# Altium PCB LAMP.PcbDoc
Units mm, origin at the board's own origin, x right, y up, seen from the top; angles counter-clockwise.
Board outline 52 x 60.73 mm, 2 copper layers (Top Layer, Bottom Layer); 27 components, 16 nets, 65 pads, 2 vias.
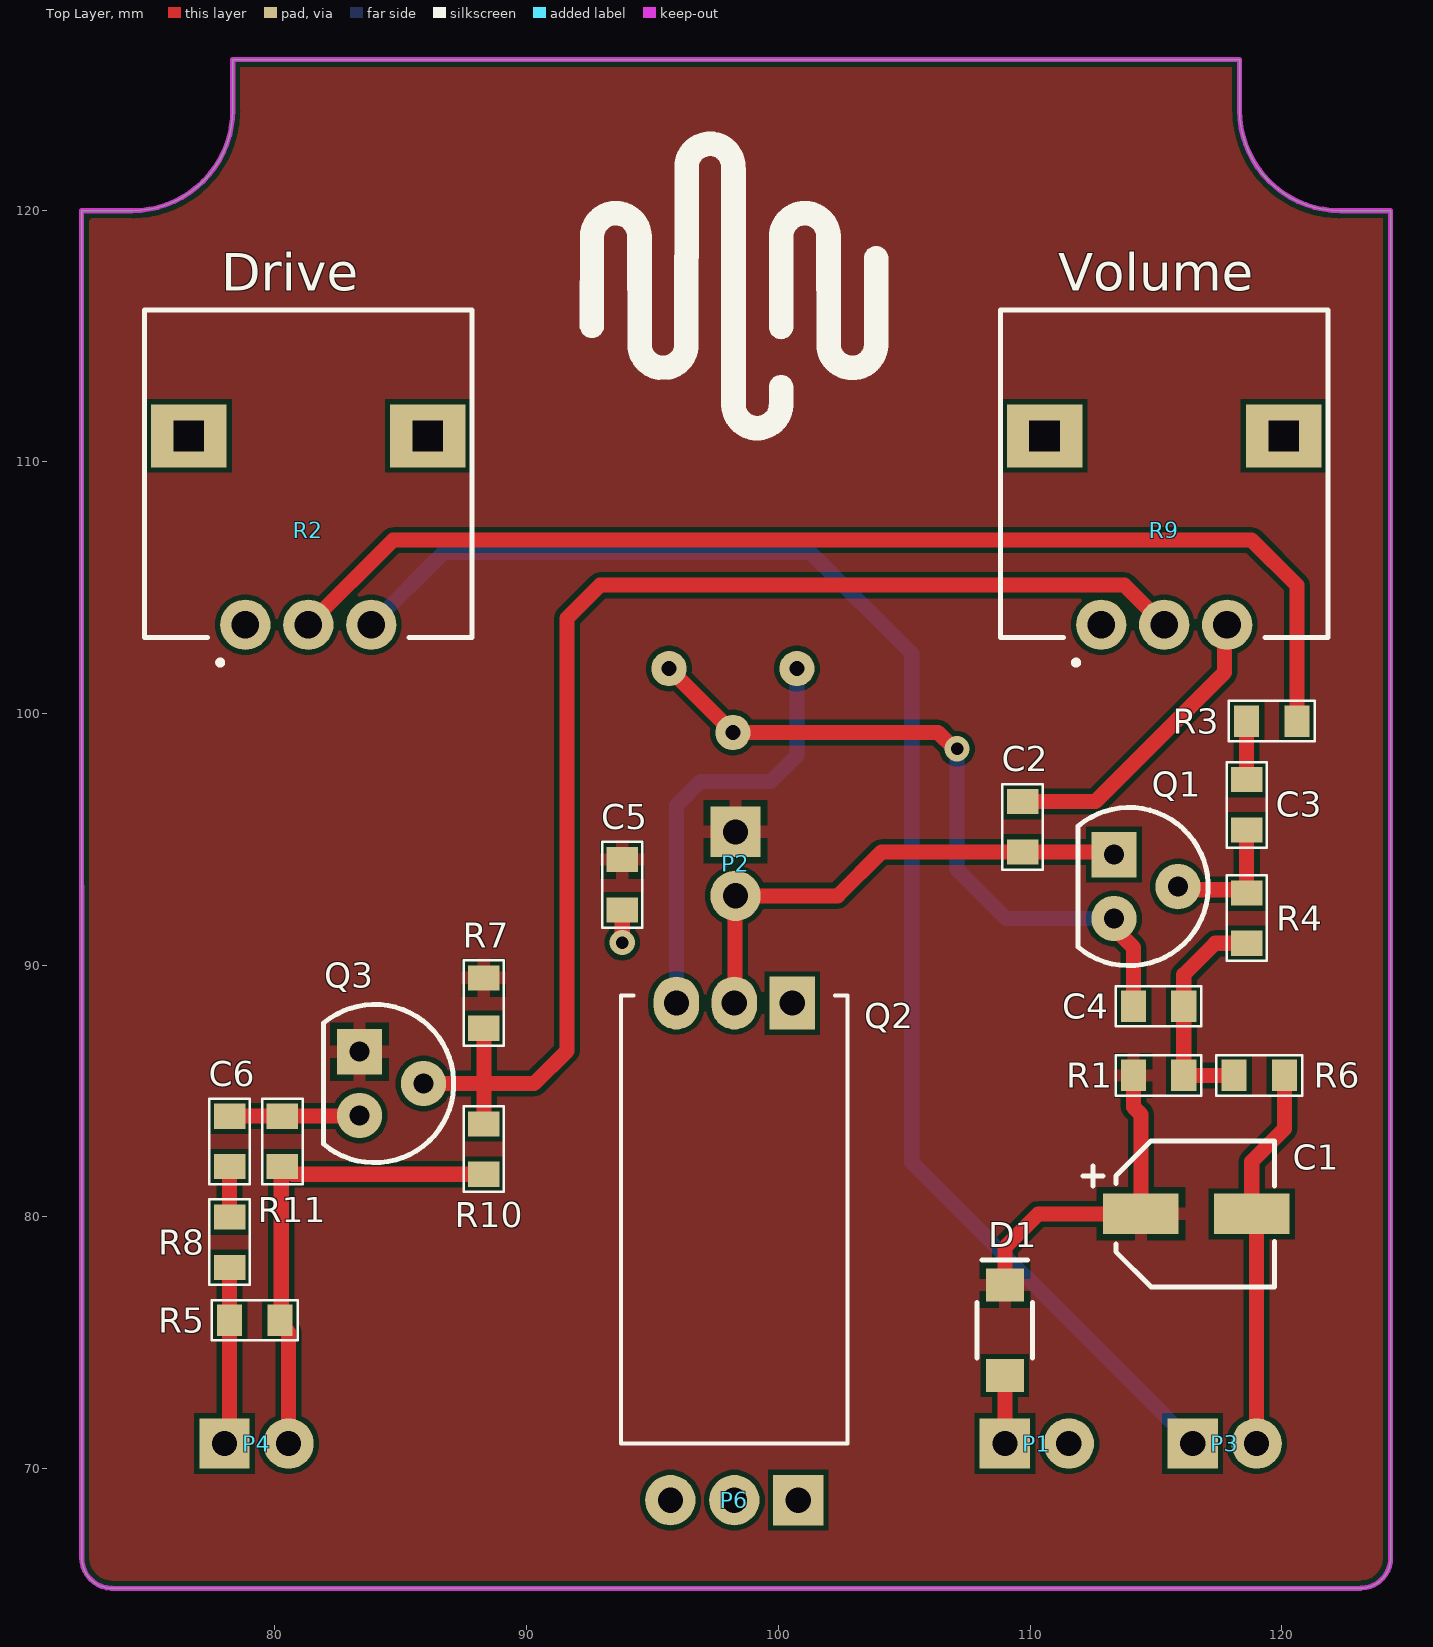
[diagram p0: Top Layer view]
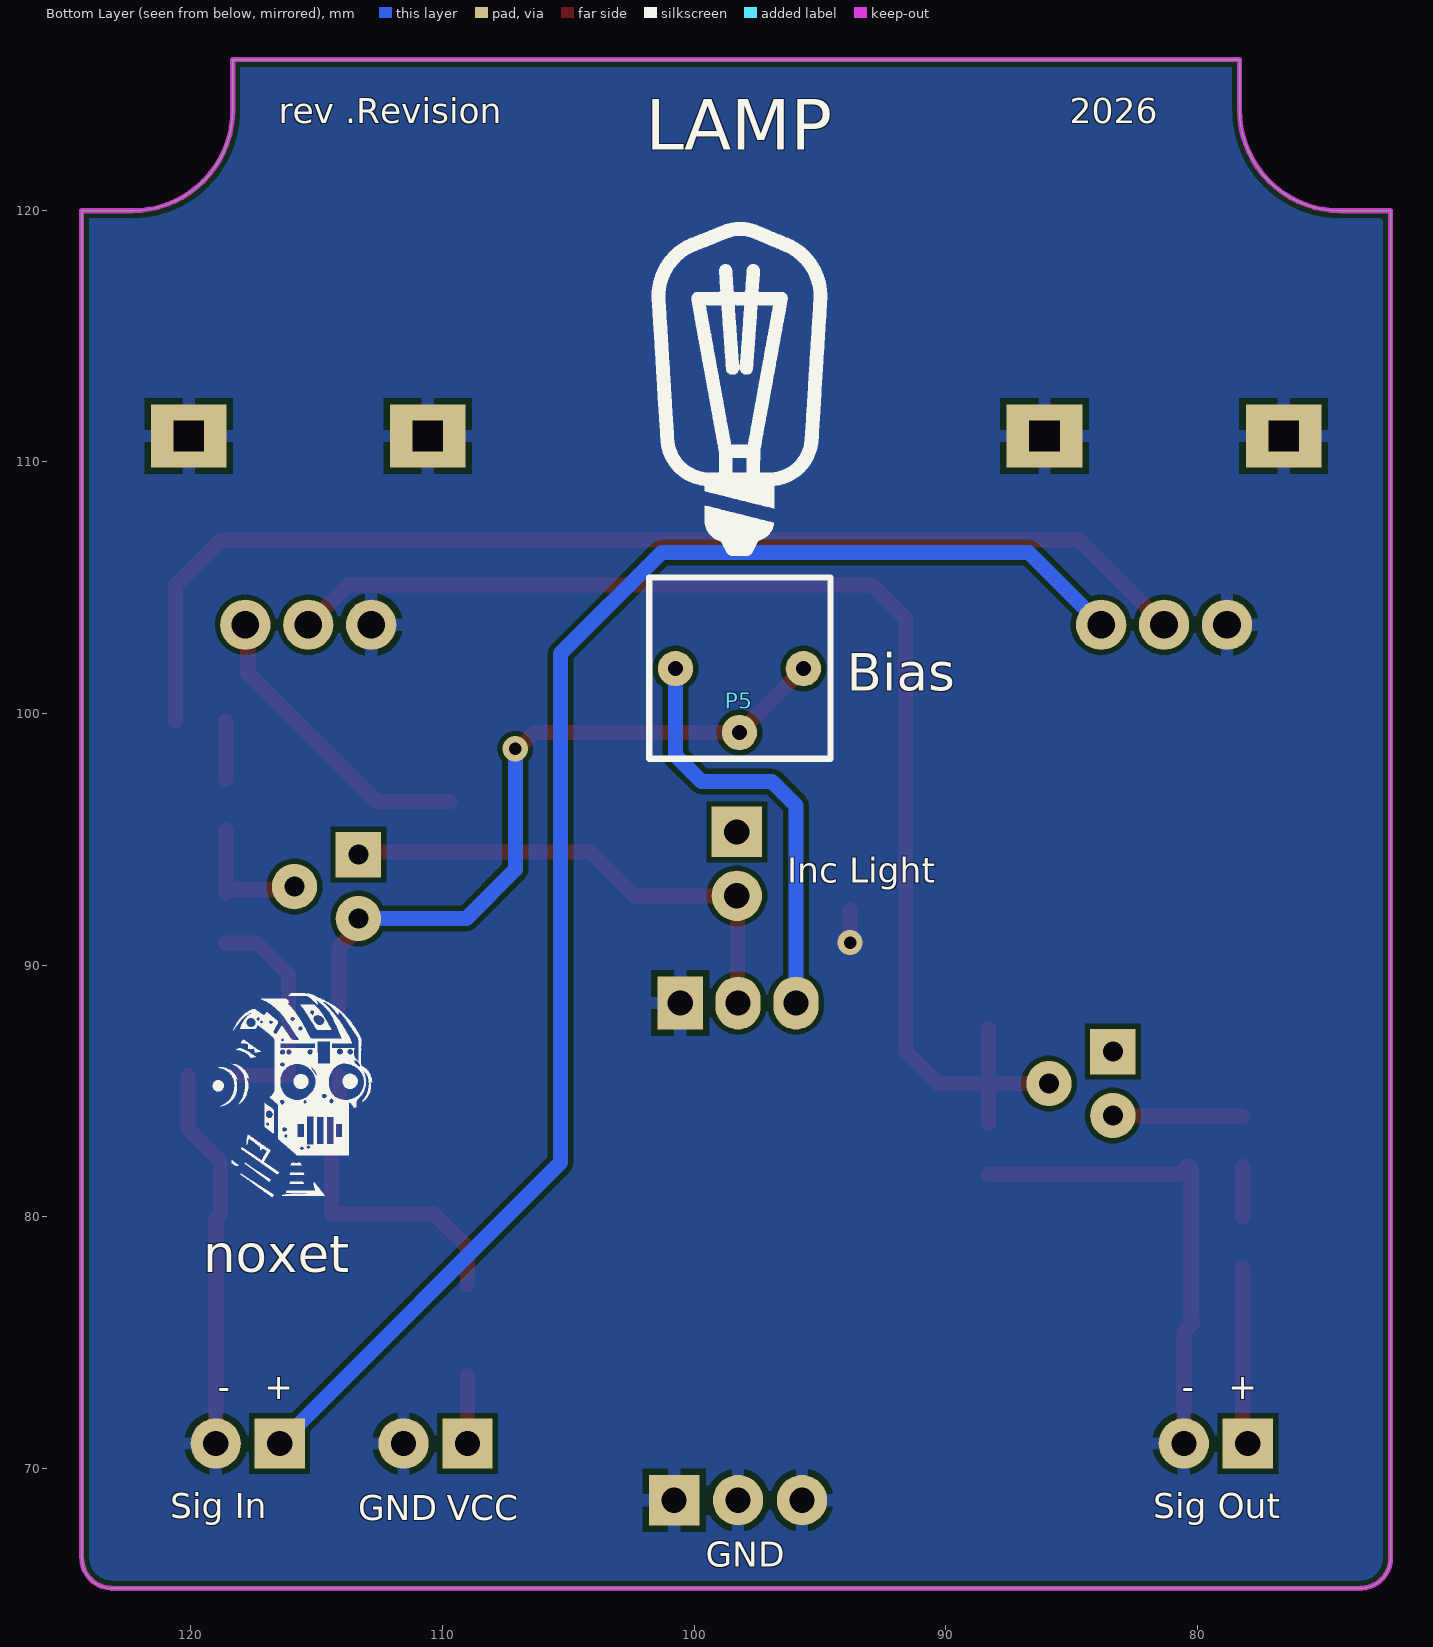
[diagram p1: Bottom Layer view, seen from below]
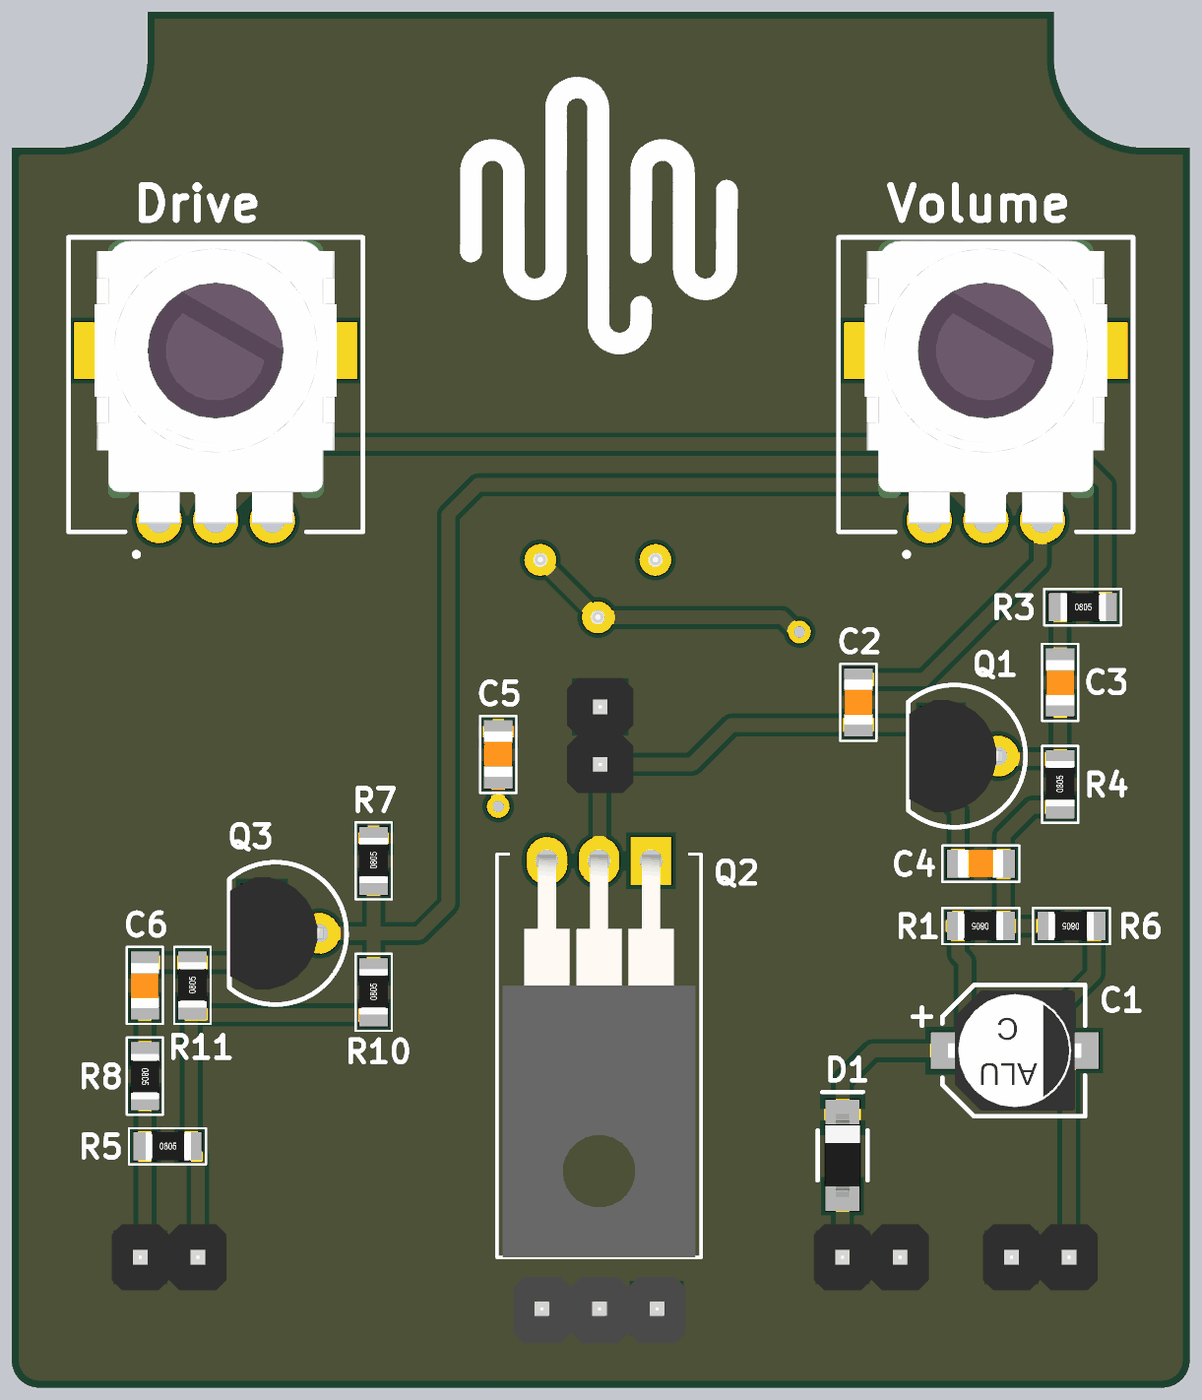
[diagram p2: 3D render of the assembled board from above, using the file's embedded part models]

## Layer stack, top to bottom
Top Solder: solder mask 0.0102, Solder Resist, Dk 3.5
Top Layer: signal copper 0.0356
Dielectric 1: dielectric 0.32, FR-4, Dk 4.8
Bottom Layer: signal copper 0.0356
Bottom Solder: solder mask 0.0102, Solder Resist, Dk 3.5

## Board outline
73.499,65.251 73.5,65.25 123.15,65.25 123.152,65.252 ccw(c123.114,66.463) 124.325,66.5 124.325,119.975 122.325,119.975 cw(c122.325,123.975) 118.325,123.975 118.325,125.975 78.325,125.975 78.325,123.975 cw(c74.325,123.975) 74.325,119.975 72.325,119.975 72.326,66.404 72.326,66.499 ccw(c73.537,66.462) 73.499,65.251

## Design rules (kind name [scope] priority, off if disabled: settings)
BoardOutlineClearance [All] p1: gap=0.3 ignorepadtopadclearanceinfootprint=FALSE except(0.4: Arc-SplitBarrior Arc-SplitContinuation Track-SplitBarrior Track-SplitContinuation SMDPad-SplitBarrior SMDPad-SplitContinuation THPad-SplitBarrior THPad-SplitContinuation Via-SplitBarrior Via-SplitContinuation Fill-SplitBarrior Fill-SplitContinuation Poly-SplitBarrior Poly-SplitContinuation Region-SplitBarrior Region-SplitContinuation Text-SplitBarrior Text-SplitContinuation)
Clearance [All] p1: gap=0.2 ignorepadtopadclearanceinfootprint=FALSE except(0.1: Arc-Arc Arc-Track Track-Track; 0.127: SMDPad-SMDPad SMDPad-Via THPad-Via Via-Via; 0.15: SMDPad-Text THPad-Text Via-Text; 0.254: Arc-Via Arc-Text Track-Via Track-Text SMDPad-THPad Fill-Text Poly-Text Region-Text Text-Text; 0.4: THPad-THPad)
HoleSize [All] p1: absolutevalues=TRUE maxlimit=6.3 minlimit=0.2 maxpercent=80.000 minpercent=20.000
HoleToHoleClearance [All] p1: gap=0.254 allowstackedmicrovias=FALSE
MinimumAnnularRing [All] p1: minimumring=0.13
MinimumSolderMaskSliver [All] p1: minsoldermaskwidth=0.13 // Black and white soldermask has 0.13, instead of 0.1mm
PolygonConnect PolygonConnect_1 [All] p1: thpad.connectstyle=Relief thpad.reliefconductorwidth=0.508 thpad.reliefentries=4 thpad.polygonreliefangle="90 Angle" thpad.airgapwidth=0.254 smdpad.connectstyle=Relief smdpad.reliefconductorwidth=0.508 smdpad.reliefentries=4 smdpad.polygonreliefangle="90 Angle" smdpad.airgapwidth=0.254 via.connectstyle=Direct via.reliefconductorwidth=0.508 via.reliefentries=4 via.polygonreliefangle="90 Angle" via.airgapwidth=0.254
RoutingCorners [All] p1: cornerstyle=Round minsetback=2.54 maxsetback=2.54
RoutingVias [All] p1: holewidth=0.5 width=1 viastyle="Through Hole" minholewidth=0.2 minwidth=0.35 maxholewidth=1 maxwidth=2
SilkToSilkClearance [All] p1: silktosilkclearance=0.1
SilkToSolderMaskClearance [IsPad] p1: minsilkscreentomaskgap=0.1 clearancetoexposedcopper=TRUE
SolderMaskExpansion [All] p1: expansion=0.05 istentingtop=FALSE
SupplyNets "Schematic Supply Nets_2" [InNet('VCC')] p1: voltage=0.000
SupplyNets "Schematic Supply Nets_1" [InNet('GND')] p2: voltage=0.000
Width PWR [InNetClass('PWR')] p1: maxlimit=0.8 minlimit=0.254 preferedwidth=0.6
Width [All] p2: maxlimit=2.54 minlimit=0.1 preferedwidth=0.6 minimp=50.000000 maximp=50.000000 favimp=50.000000
24 further rules are at their usual default settings.

## Components (designator, comment, footprint, x,y, rotation, side; value= is the part's Value field where it differs from the comment)
C1 "Capacitor, TH 2mm" "Cap, SMD, Polar, 5.3x5.3mm" 116.605,80.125 r90 top value=47u
C2 "0805, capacitor" "0805, cap" 109.7,96.5 r270 top value=1u
C3 "0805, capacitor" "0805, cap" 118.605,95.375 r90 top value=1u
C4 "0805, capacitor" "0805, cap" 114.105,88.375 r0 top value=1u
C5 "0805, capacitor" "0805, cap" 93.8,94.2 r270 top value=100n
C6 "0805, capacitor" "0805, cap" 78.2,82 r90 top value=100n
D1 "BAT48ZFILM" SOD123 109,75.5 r90 top
P1 "1x2 Pin Header" padtwo_L 109,71 r90 top
P2 "1x2 Pin Heade Straight" padtwo_L 98.3,95.3 r0 top locked value="1x2 Pin Header"
P3 "1x2 Pin Heade Straight" padtwo_L 116.46,71 r90 top value="1x2 Pin Header"
P4 "1x2 Pin Heade Straight" padtwo_L 78,71 r90 top value="1x2 Pin Header"
P5 "Pot" POT_3362P 98.2,101.8 r180 bottom value=2k
P6 "1x3 Pin Header" padThree_L 98.25,68.75 r180 top
Q1 "BC547B" BC547_TO-92_BENT 114.605,93.125 r0 top
Q2 "BD139" "TO-126 Angle" 100.55,88.5 r180 top
Q3 "BC547B" BC547_TO-92_BENT 84.63,85.3 r0 top
R1 "General resistor" 0805 116.105,85.625 r180 top value=100k
R2 "100k" RK09L_15mm 81.327,110.978 r0 top locked value=0
R3 "General resistor" 0805 118.6,99.7 r0 top value=1k
R4 "General resistor" 0805 118.605,90.875 r90 top value=10k
R5 "General resistor" 0805 78.2,75.9 r0 top value=470k
R6 "General resistor" 0805 120.105,85.625 r180 top value=22k
R7 "General resistor" 0805 88.3,87.5 r90 top value=100k
R8 "General resistor" 0805 78.2,80 r270 top value=100R
R9 "100k" RK09L_15mm 115.327,110.978 r0 top locked value=0
R10 "General resistor" 0805 88.3,81.7 r90 top value=120k
R11 "General resistor" 0805 80.3,82 r90 top value=10k

## Footprints (in the part's own frame and the unit in brackets; to place one, negate y for a bottom-side part, rotate by r counter-clockwise, add the part's x,y. Pads: shape width x height; smd on the part's side, far side on the other; paste and mask are expansions set on the pad)
0805 [mm]
  rect 1x1.25 smd: 0(2,0) 1(0,0)
  silkscreen extent -0.7,-0.8 2.7,0.8, body extent 0.03,-0.62 2.03,0.63, height 0.5
"0805, cap" [mm]
  rect 1x1.25 smd: 1(0,0) 2(2,0)
  silkscreen extent -0.7,-0.8 2.7,0.8, body extent -0.01,-0.62 1.99,0.63, height 0.8
BC547_TO-92_BENT [mm]
  rect 1.8x1.8 hole 0.8: 1(-1.27,1.27)
  round 1.8 hole 0.8: 2(1.27,0) 3(-1.27,-1.27)
  silkscreen extent -2.7,-3.14 2.47,3.14, body extent -2.67,-2.49 1.44,2.49, height 9.5
"Cap, SMD, Polar, 5.3x5.3mm" [mm] "Wurth WCAP-ASLI series"
  rect 1.6x3 smd: 1(0,-2.2) 2(0,2.2)
  silkscreen extent -2.9,-3.1 2.9,4.5, body extent -2.65,-2.95 2.65,2.95, height 5.41
padThree_L [mm] "Pad Diameter 2 mm, Hole  0.3 mm, Pitch 2.54 mm"
  rect 2x2 hole 1: 1(-2.54,0)
  round 2 hole 1: 2(0,0) 3(2.54,0)
  body extent -3.83,-1.38 3.79,1.54, height 8.53
padtwo_L [mm] "Pad Diameter 2 mm, Hole  0.3 mm, Pitch 2.54 mm"
  rect 2x2 hole 1: 1(0,0)
  round 2 hole 1: 2(0,-2.54)
  body extent -1.46,-3.81 1.46,1.27, height 8.51
POT_3362P [mm] "Trimpot  3362P"
  round 1.4 hole 0.6: 1(2.544,-0.014) 2(0.004,-2.554) 3(-2.536,-0.014)
  silkscreen extent -3.58,-3.6 3.62,3.6, body extent -3.3,-3.3 3.3,3.3, height 4.4
RK09L_15mm [mm] "Vertical Potentiometer, also known as RK097N"
  round 2 hole 1.1 mask+0.05: 1(-2.5,-7.45) 2(0,-7.45) 3(2.5,-7.45)
  rect 3x2.5 hole 1.2 square mask+0.05: MH(-4.75,0.05) MH(4.75,0.05)
  silkscreen extent -6.5,-9.05 6.5,5.05, body extent -6.05,-7.6 6.05,4.9, height 25.01
SOD123 [mm]
  rect 1.3x1.5 smd: 1(1.8,0) 2(-1.8,0)
  silkscreen extent -1.1,-1.1 2.8,1.1, body extent -1.85,-0.8 1.85,0.8, height 1.27
"TO-126 Angle" [mm] "Horizontal angled TO-126"
  rect 1.8x2.1 hole 1: 1(0,0)
  oval 1.8x2.1 hole 1: 2(2.3,0) 3(4.6,0)
  silkscreen extent -2.2,-0.3 6.8,17.5, body extent -1.95,-0.28 6.55,17.5, height 2.8

## Part data
C1: "Capacitor TH 2mm"
D1: "Rectifier Diode, Schottky, 1 Phase, 1 Element, 0.35A, 40V V(RRM), Silicon", Forward Voltage=250mV, Manufacturer=STMicroelectronics, Max Operating Temperature=150°C, Max Output current=350mA, Non-rep Pk Forward Current-Max=2A, Package Body Material=Plastic, Package Shape=Rectangular, Package Style="SMALL OUTLINEMeter", Peak Reflow Temperature (Cel)=260°C, Rep Pk Reverse Voltage-Max=40V, Supplier Part Number=7146853P, Time @ Peak Reflow Temperature-Max (s)=30s, Category="Rectifier Diodes", ComponentLink1Description=https://datasheet.ciiva.com:443/pdfs/VipMasterIC/IC/SGST/SGSTS30425/SGSTS30425-1.pdf?src-supplier=IHS+Markit, ComponentLink1URL=https://datasheet.ciiva.com:443/pdfs/VipMasterIC/IC/SGST/SGSTS30425/SGSTS30425-1.pdf?src-supplier=IHS+Markit, ComponentLink2Description=https://datasheet.ciiva.com/16421/cd00130229-16421639.pdf?src-supplier=Future+Electronics, ComponentLink2URL=https://datasheet.ciiva.com/16421/cd00130229-16421639.pdf?src-supplier=Future+Electronics, ComponentLink3Description=https://datasheet.ciiva.com/915/cd00130229-915584.pdf?src-supplier=Digikey, ComponentLink3URL=https://datasheet.ciiva.com/915/cd00130229-915584.pdf?src-supplier=Digikey, ComponentLink4Description=https://datasheet.ciiva.com/915/cd00130229-915585.pdf?src-supplier=Digikey, ComponentLink4URL=https://datasheet.ciiva.com/915/cd00130229-915585.pdf?src-supplier=Digikey, ComponentLink5Description=https://datasheet.ciiva.com/915/cd00130229-915586.pdf?src-supplier=Digikey, ComponentLink5URL=https://datasheet.ciiva.com/915/cd00130229-915586.pdf?src-supplier=Digikey, ComponentLink6Description=https://datasheet.ciiva.com/4714/cd00130229-4714093.pdf?src-supplier=Mouser, ComponentLink6URL=https://datasheet.ciiva.com/4714/cd00130229-4714093.pdf?src-supplier=Mouser, Diode Element Material=SILICON, Diode Type=RECTIFIER, JESD-30 Code=R-PDSO-G2, JESD-609 Code=e3, Manufacturer Part Number=BAT48ZFILM, Number of Elements=1, Pins=2, Pricing="250=2,567, 500=2,311, 1250=2,081, 2500=1,976 (SEK)", Qualification Status="Not Qualified", Reach SVHC Compliant=No, RoHS=Yes, RoHS Compliant=Yes, Stock=13200, Supplier=Rs, Surface Mount=Yes, Technology=SCHOTTKY, Terminal Finish=Tin, Terminal Form="Gull Wing", Terminal Position=DUAL
P1 P2 P3 P4: "2.54 mm, TH"
P6: "2.54 mm"
Q1 Q3: library part "NPN CBE"
Q2: library part "NPN ECB"
R1 R3 R4 R5 R6 R7 R8 R10 R11: library part resistor
R2 R9: library part Potentiometer, "Potentiometer", ELFA=300-08-353

## Via types
v1: diameter 1, hole 0.5, Top Layer to Bottom Layer, 2 vias

## Nets (pads, with @x,y where several pads share a name; then routed paths per layer and width w, separated by ;. In a path a pad name is that pad's centre, name@x,y a point inside that pad or via, vN(x,y) a via of type N, cw(c..) or ccw(c..) an arc to the next point about the centre after c; other vN are vias at no path point)
Bias: C4.2 R1.1 R4.1 R6.0 | length 9
  Top Layer w0.6: R6.0 R1.1 C4.2 116.105,89.625 117.355,90.875 R4.1
GND: C1.1 C5.2 P1.2 P3.2 P4.2 P6.1 P6.2 P6.3 Q2.1 R2.1 R2.MH R5.0 R6.1 R9.1 R9.MH R10.1 R11.1 | length 35.9
  Top Layer w0.6: P4.2 80.54,75.435 80.2,75.775 R5.0 80.25,75.95 80.25,81.95 R11.1 80.425,82 80.725,81.7 R10.1 ; v1(93.8,90.9) C5.2 ; P3.2 119,79.93 C1.1 118.805,82.205 120.105,83.505 R6.1
NetC2_1: C2.1 R9.3 | length 12.1
  Top Layer w0.6: C2.1 112.6,96.5 117.728,101.628 117.728,103.429 R9.3
NetC3_2: C3.2 R3.1 | length 2.3
  Top Layer w0.6: R3.1 118.603,99.697 118.603,97.378 C3.2
NetC4_1: C4.1 P5.1 P5.2 Q1.3 | length 28.4
  Top Layer w0.6: P5.1 P5.2 106.346,99.246 106.992,98.6 v1(107.1,98.6) ; Q1.3 113.335,91.476 114.105,90.706 C4.1
  Bottom Layer w0.6: v1(107.1,98.6) 107.1,93.8 109.045,91.855 Q1.3
NetC6_1: C6.1 R8.1 | length 2
  Top Layer w0.6: R8.1 C6.1
NetD1_2: D1.2 P1.1 | length 2.7
  Top Layer w0.6: P1.1 D1.2
NetP5_3: P5.3 Q2.3 | length 16.9
  Bottom Layer w0.6: Q2.3 95.95,96.35 96.9,97.3 99.7,97.3 100.736,98.336 P5.3
NetR2_2: R2.2 R3.0 | length 46.8
  Top Layer w0.6: R2.2 84.699,106.9 118.8,106.9 120.6,105.1 R3.0
SigIn: P3.1 R2.3 | length 60.3
  Bottom Layer w0.6: R2.3 86.699,106.4 101.28,106.4 105.3,102.38 105.3,82.16 P3.1
SigOut: P4.1 R5.1 R8.0 | length 7.1
  Top Layer w0.6: P4.1 78.2,71.2 R5.1 R8.0
VCC: C1.2 C5.1 D1.1 P2.1 Q3.1 R1.0 R7.0 | length 13.1
  Top Layer w0.6: D1.1 109,78.8 110.325,80.125 C1.2 114.405,84.075 114.105,84.375 R1.0
Vin_buf: Q3.2 R7.1 R9.2 R10.0 | length 52.4
  Top Layer w0.6: Q3.2 88.3,85.3 ; 88.037,85.3 90.3,85.3 91.6,86.6 91.6,103.788 92.912,105.1 113.754,105.1 R9.2 ; R10.0 88.3,85.3 ; R7.1 88.3,85.9 88.3,85.3
Vin_lamp: C3.1 Q1.2 R4.0 | length 5.3
  Top Layer w0.6: Q1.2 116,93 118.48,93 R4.0 C3.1
Vout_buf: C6.2 Q3.3 R11.0 | length 5.2
  Top Layer w0.6: C6.2 78.215,84.015 83.345,84.015 Q3.3
Vout_lamp: C2.2 P2.2 Q1.1 Q2.2 | length 20.1
  Top Layer w0.6: Q2.2 98.275,88.525 98.275,92.735 P2.2 102.36,92.76 104.1,94.5 C2.2 113.23,94.5 Q1.1

## Polygon pours and split planes (outlines as drawn)
GND on Bottom Layer "GND_L02_P002" (solid, pour order 2): 68.5,129 125.75,129 125.75,63.5 68.5,63.5
VCC on Top Layer "VCC_L01_P003" (solid, pour order 3): 70,128 127,128 127,62 70,62

## Keep-outs
Keep-Out Layer:
  lines w0.2: 72.326,66.404 72.325,119.975 74.325,119.975 ccw(c74.325,123.975) 78.325,123.975 78.325,125.975 118.325,125.975 118.325,123.975 ccw(c122.325,123.975) 122.325,119.975 124.325,119.975 124.325,66.5 cw(c123.114,66.463) 123.152,65.252 ; 72.326,66.499 ccw(c73.537,66.462) 73.499,65.251 73.499,65.251 ; 123.15,65.25 73.5,65.25 ; 73.499,65.251 73.5,65.25 ; 73.5,65.25 73.5,65.25

## Silkscreen, mask and mechanical layers (free items; w line width, h text height)
Top Overlay:
  drawing of 2 lines, arcs and shapes, not listed
  text "Drive" at 77.876,116.8 h1.5
  text "Volume" at 111.126,116.8 h1.5
Bottom Overlay:
  drawing of 20 lines, arcs and shapes, not listed
  text "2026" at 85.083,123.45 h1
  text "rev .Revision" at 116.499,123.45 h1
  text "LAMP" at 101.915,122.4 h2
  text "Bias" at 93.924,100.9 h1.5
  text "Inc Light" at 96.3,93.283 h1
  text "noxet" at 119.499,77.8 h1.5
  text "+" at 77.627,72.75 h1
  text "-" at 80.127,72.75 h1
  text "+" at 115.917,72.75 h1
  text "-" at 118.417,72.75 h1
  text "Sig Out" at 81.76,68.033 h1
  text "Sig In" at 120.8,68.033 h1
  text "VCC" at 109.833,67.95 h1
  text "GND" at 113.333,67.95 h1
  text "GND" at 99.533,66.1 h1
Drill Drawing:
  circle w0.013: c98.327,76.478 r3.5
  circle w0.013: c115.327,110.978 r3.55
  circle w0.013: c81.327,110.978 r3.55
  circle w0.013: c98.327,93.978 r3.55
  circle w0.013: c98.327,33.978 r6.25
  circle w0.013: c85.827,76.478 r2.75
  lines w0.013: 72.327,27.978 74.327,27.978 cw(c74.327,23.978) 78.327,23.978 78.327,21.978 118.327,21.978 118.327,23.978 cw(c122.327,23.978) 122.327,27.978 124.327,27.978
  lines w0.1: 72.327,27.978 72.327,119.978 74.327,119.978 ccw(c74.327,123.978) 78.327,123.978 78.327,125.978 118.327,125.978 118.327,123.978 ccw(c122.327,123.978) 122.327,119.978 124.327,119.978 124.327,27.978